# Altium PCB BrushlessDriver.PcbDoc (part 2 of 2)
Units mm, origin at the board's own origin, x right, y up, seen from the top; angles counter-clockwise.
Board outline 27.94 x 39.37 mm, 4 copper layers (Component Side, Ground Plane, Power Plane, Solder Side), stack 0.844 mm thick; 77 components, 59 nets, 274 pads, 183 vias.
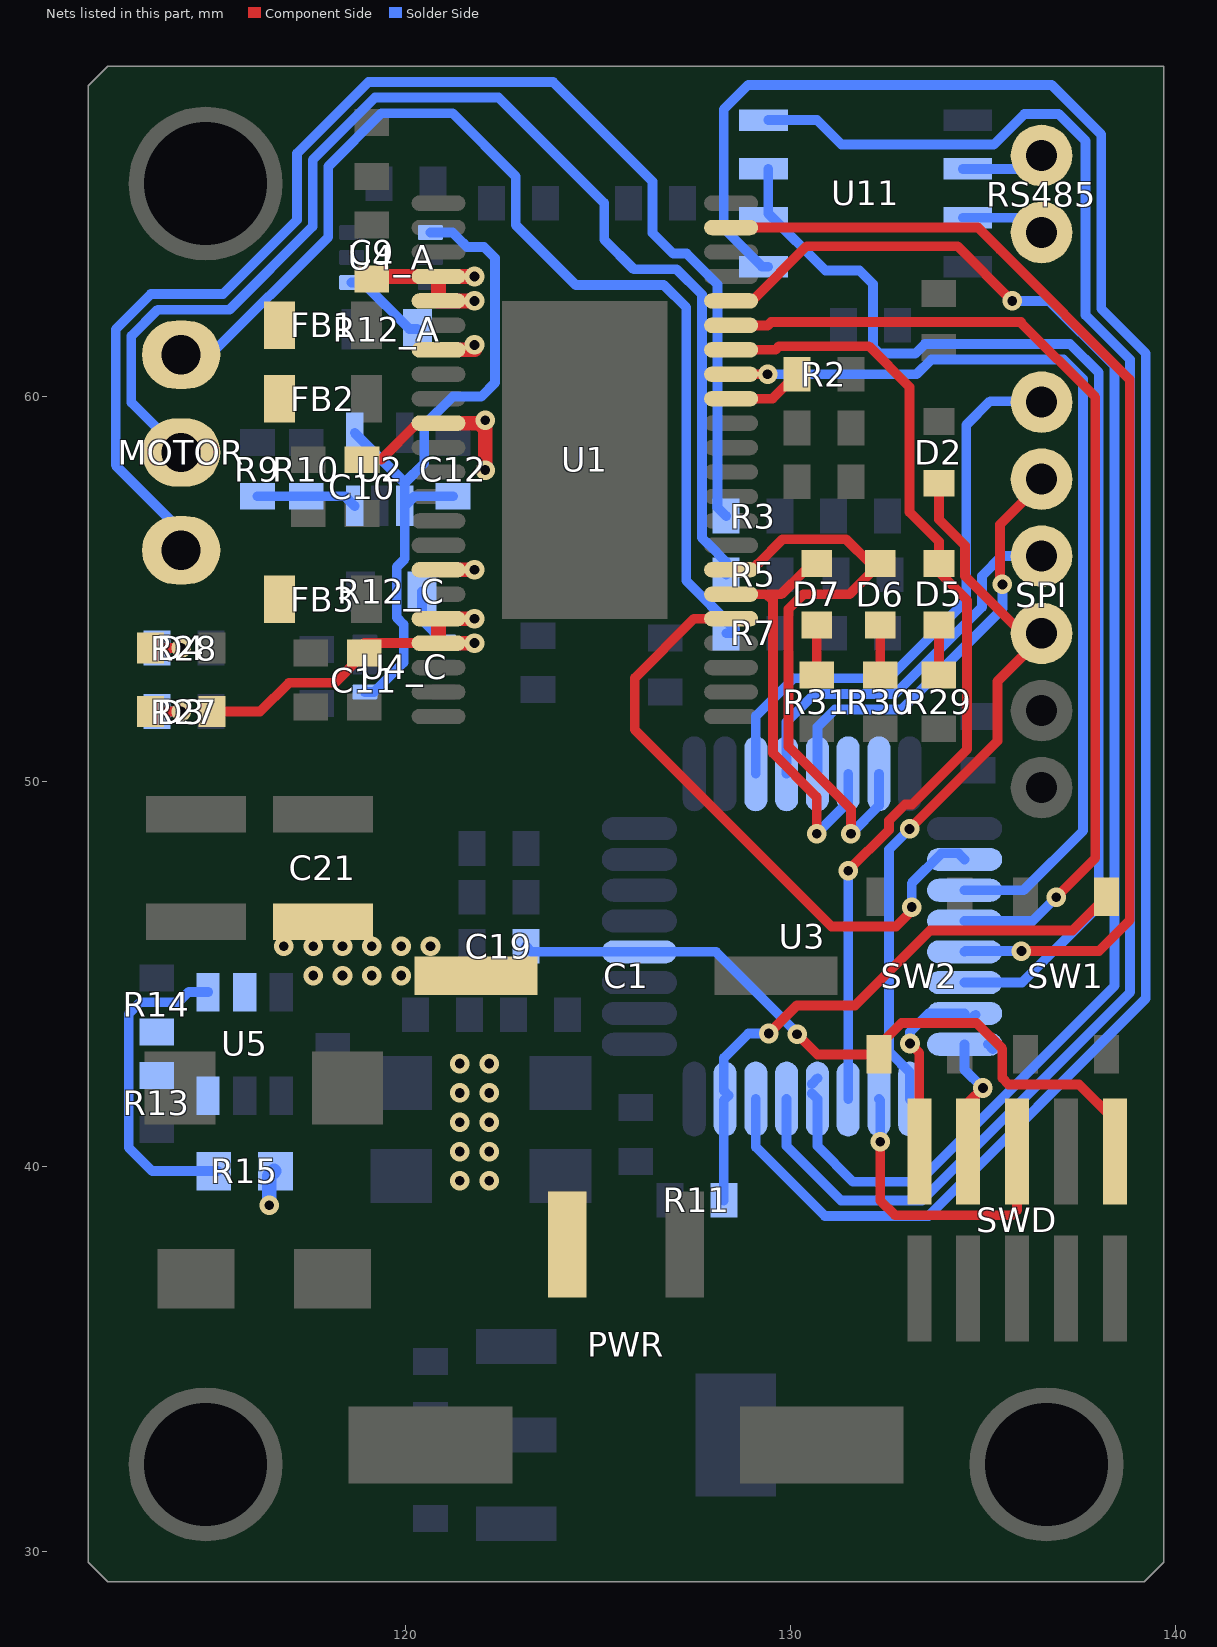
[diagram p4: the nets of this part, all layers, seen from the top]

## Via types
v1: diameter 0.508, hole 0.254, Component Side to Solder Side, 155 vias
v2: diameter 0.5, hole 0.2, Component Side to Solder Side, 28 vias

## Nets (pads, with @x,y where several pads share a name; then routed paths per layer and width w, separated by ;. In a path a pad name is that pad's centre, name@x,y a point inside that pad or via, vN(x,y) a via of type N, cw(c..) or ccw(c..) an arc to the next point about the centre after c; other vN are vias at no path point) (continued)
NetD3_C: D3.C R27.1 | length 1.4
  Component Side w0.254: D3.C@113.373,51.816 v1(114.173,51.816)
  Solder Side w0.254: R27.1@113.549,51.816 v1(114.173,51.816)
NetD4_C: D4.C R28.2 | length 1.4
  Component Side w0.254: D4.C@113.373,53.467 v1(114.173,53.467)
  Solder Side w0.254: R28.2@113.538,53.467 v1(114.173,53.467)
NetD5_C: D5.C R29.2 | length 1.3
  Component Side w0.254: R29.2@133.858,52.77 D5.C@133.858,54.064
NetD6_C: D6.C R30.2 | length 1.5
  Component Side w0.254: R30.2@132.08,52.77 R30.2@132.207,52.897 ; R30.2@132.334,52.77 D6.C@132.334,54.064
NetD7_C: D7.C R31.2 | length 1.3
  Component Side w0.254: R31.2@130.683,52.77 D7.C@130.683,54.064
NetR2_1: R2.1 U1.14 | length 2
  Component Side w0.254: U1.14@128.459,59.944 129.537,59.944 R2.1@130.172,60.579
NetR9_1: R9.1 R10.2 U2.3 | length 2.6
  Solder Side w0.254: R9.1@116.156,57.41 R10.2@117.426,57.41 118.431,57.41 U2.3@118.681,57.16
NetR11_2: R11.2 SW1.1 U3.31 | length 15.5
  Component Side w0.254: v1(129.438,43.452) 130.165,44.179 131.682,44.179 133.629,46.126 137.328,46.126 SW1.1@138.21,47.008
  Solder Side w0.254: R11.2@128.27,39.116 128.27,41.717 U3.31@128.302,41.749 128.397,41.844 128.27,41.971 128.27,42.814 128.907,43.452 v1(129.438,43.452)
NetR12_A_2: R12_A.2 U1.29 U4_A.4 | length 3.3
  Component Side w0.381: U1.29@120.859,61.214 121.793,61.214 v1(121.793,61.341)
  Solder Side w0.254: U4_A.4@118.6,62.962 118.89,62.962 120.1,61.752 R12_A.2@120.309,61.752
NetR12_C_2: R12_C.2 U1.38 U4_C.4 | length 2.5
  Component Side w0.381: U1.38@120.859,55.499 v1(121.793,55.499)
  Solder Side w0.254: R12_C.2@120.428,54.935 120.428,54.19 U4_C.4@120.994,53.624
NetR13_2: R13.2 R14.1 U5.3
NetR15_1: R15.1 U5.4 | length 8.3
  Solder Side w0.254: U5.4@114.874,44.53 114.367,44.53 114.104,44.267 113.113,44.267 112.809,43.962 112.809,40.49 113.421,39.878 R15.1@115.124,39.878
NRST: C19.2 SW2.1 SWD.10 U3.4 | length 19.3
  Component Side w0.254: v1(130.175,43.434) 130.701,42.908 SW2.1@132.3,42.908 132.448,43.056 132.448,43.287 132.887,43.725 134.837,43.725 135.506,43.056 135.506,42.292 135.669,42.129 137.5,42.129 138.43,41.199 SWD.10@138.43,40.386
  Solder Side w0.254: C19.2@123.128,45.72 123.274,45.574 U3.4@126.077,45.574 128.07,45.574 130.175,43.469 v1(130.175,43.434)
OUT_A: FB1.2 MOTOR.1 R7.2 | length 28.8
  Solder Side w0.254: MOTOR.1@114.173,61.087 114.935,61.087 117.996,64.148 117.996,65.982 119.374,67.361 121.227,67.361 122.865,65.722 122.865,64.46 124.424,62.901 126.71,62.901 127.296,62.315 127.296,55.213 128.555,53.954 128.555,53.848 R7.2@128.332,53.848
OUT_B: FB2.2 MOTOR.2 R5.2 | length 32.2
  Solder Side w0.254: MOTOR.2@114.173,58.547 112.878,59.842 112.878,61.571 113.562,62.255 115.427,62.255 117.589,64.418 117.589,66.151 119.206,67.767 122.42,67.767 125.163,65.025 125.163,64.075 125.93,63.307 127.044,63.307 127.703,62.648 127.703,56.33 127.866,56.167 127.871,56.167 128.332,55.706 R5.2@128.332,55.372
OUT_C: FB3.2 MOTOR.3 R3.2 | length 34.8
  Solder Side w0.254: MOTOR.3@114.173,56.007 114.173,56.514 112.471,58.215 112.471,61.747 113.386,62.662 115.259,62.662 117.183,64.586 117.183,66.319 119.037,68.174 123.838,68.174 126.421,65.59 126.421,64.248 126.956,63.714 127.307,63.714 128.109,62.912 128.109,57.119 R3.2@128.332,56.896
PA11: U1.21 U3.21 | length 30.7
  Component Side w0.254: U1.21@128.459,64.389 134.874,64.389 135.445,63.817 135.445,63.815 138.814,60.446 138.814,46.392 138.015,45.593 v1(136.002,45.593)
  Solder Side w0.254: U3.21@134.527,45.574 134.546,45.593 v1(136.002,45.593)
PB0: D7.A U1.6 U3.14 | length 11
  Component Side w0.254: U1.6@128.459,54.864 129.382,54.864 ; D7.A@130.492,55.474 130.511,55.454 130.354,55.454 129.763,54.864 129.382,54.864 ; v1(130.683,48.641) 130.683,49.6 129.547,50.736 129.547,54.699 129.382,54.864
  Solder Side w0.254: v1(130.683,48.641) 131.502,49.46 U3.14@131.502,50.199
PB1: D6.A U1.7 U3.15 | length 15.5
  Component Side w0.254: U1.7@128.459,55.499 128.992,55.499 129.147,55.655 129.158,55.655 129.796,56.293 131.451,56.293 D6.A@132.08,55.664 ; v1(131.572,48.641) 131.572,49.286 129.954,50.904 129.954,54.48 130.338,54.864 131.534,54.864 D6.A@132.334,55.664
  Solder Side w0.254: v1(131.572,48.641) 132.302,49.371 U3.15@132.302,50.199
PB4: D5.A U1.16 U3.27 | length 25.6
  Component Side w0.254: U1.16@128.459,61.214 129.612,61.214 129.706,61.308 132.038,61.308 133.096,60.25 133.096,56.996 133.858,56.234 D5.A@133.858,55.664 133.858,55.44 134.587,54.711 134.587,50.834 133.156,49.403 132.977,49.403 132.563,48.989 132.563,48.743 v1(131.502,47.682)
  Solder Side w0.254: U3.27@131.502,41.749 v1(131.502,47.682)
PB5: U1.18 U3.28 | length 39.8
  Component Side w0.254: U1.18@128.459,62.484 128.502,62.527 128.959,62.527 129.002,62.484 130.424,63.906 134.341,63.906 v1(135.763,62.484)
  Solder Side w0.254: U3.28@130.556,41.895 U3.28@130.702,41.749 130.702,40.526 131.63,39.599 133.325,39.599 138.417,44.691 138.417,60.791 136.724,62.484 v1(135.763,62.484) ; U3.28@130.556,42.139 U3.28@130.708,42.291
RS485_A: RS485.1 U11.6 | length 2.3
  Solder Side w0.254: U11.6@134.48,65.913 U11.6@134.607,65.913 136.287,65.913 RS485.1@136.652,66.278
RS485_B: RS485.2 U11.7 | length 2.3
  Solder Side w0.254: U11.7@134.48,64.643 U11.7@134.607,64.643 136.287,64.643 RS485.2@136.652,64.278
SPI1_MISO: SPI.3 U3.12 | length 10.2
  Solder Side w0.254: U3.12@129.902,50.199 129.902,51.543 130.632,52.273 132.721,52.273 134.976,54.528 134.976,55.339 135.491,55.855 SPI.3@136.525,55.855
SPI1_MOSI: SPI.2 U3.13 | length 11.2
  Component Side w0.254: v1(135.509,55.118) 135.445,55.181 135.445,56.674 SPI.2@136.652,57.88
  Solder Side w0.254: U3.13@130.702,50.199 130.702,51.412 131.157,51.867 132.889,51.867 135.509,54.486 v1(135.509,55.118)
SPI1_NSS/PA15: D2.A SPI.4 U3.25 | length 19.5
  Component Side w0.254: v1(133.096,48.768) 135.382,51.054 135.382,52.603 136.652,53.873 135.999,53.873 134.537,55.335 134.537,56.13 133.858,56.809 D2.A@133.858,57.747
  Solder Side w0.254: v1(133.096,48.768) 132.563,48.235 132.563,42.983 132.881,42.664 132.881,42.647 132.899,42.647 133.102,42.443 U3.25@133.102,41.749
SPI1_SCK: SPI.1 U3.11 | length 15.1
  Solder Side w0.254: U3.11@129.102,50.199 129.102,51.699 130.083,52.68 132.553,52.68 134.569,54.696 134.569,59.258 135.191,59.88 SPI.1@136.652,59.88
SWCLK: SWD.4 U3.24 | length 3.3
  Component Side w0.254: SWD.4@134.62,40.386 134.62,41.656 v1(135.001,42.037)
  Solder Side w0.254: U3.24@134.527,43.174 134.527,42.511 v1(135.001,42.037) ; U3.24@135.134,43.174 U3.24@135.255,43.053
SWDIO: SWD.2 U3.23 | length 5
  Component Side w0.254: v1(133.108,43.192) 133.35,42.95 SWD.2@133.35,40.386
  Solder Side w0.254: v1(133.108,43.192) 133.108,43.493 133.589,43.974 U3.23@134.527,43.974 ; U3.23@134.686,43.815 U3.23@134.813,43.942
SWO: SWD.6 U3.26 | length 7.9
  Component Side w0.254: v1(132.334,40.64) 132.334,39.116 132.718,38.732 135.76,38.732 135.89,38.862 SWD.6@135.89,40.386
  Solder Side w0.254: U3.26@132.302,41.749 132.334,41.717 v1(132.334,40.64)
TIM1_CH1: U1.5 U3.18 | length 16.4
  Component Side w0.254: U1.5@128.459,54.229 127.497,54.229 125.959,52.691 125.959,51.341 131.071,46.229 132.741,46.229 133.152,46.64 v1(133.152,46.736)
  Solder Side w0.254: v1(133.152,46.736) 133.152,47.356 133.929,48.133 134.368,48.133 U3.18@134.527,47.974
TIM1_CH2: U1.15 U3.19 | length 25
  Component Side w0.254: U1.15@128.459,60.579 v1(129.409,60.579)
  Solder Side w0.254: v1(129.409,60.579) 133.28,60.579 133.661,60.96 137.099,60.96 137.605,60.454 137.605,48.718 136.061,47.174 U3.19@134.527,47.174
TIM1_CH3: U1.17 U3.20 | length 26.4
  Component Side w0.254: U1.17@128.459,61.849 129.413,61.849 129.5,61.936 135.992,61.936 135.981,61.925 137.922,59.984 137.922,48.006 v1(136.906,46.99)
  Solder Side w0.254: U3.20@134.527,46.374 136.29,46.374 v1(136.906,46.99)
USART1_RTS_DE: U3.22 U11.2 U11.3 | length 30.8
  Solder Side w0.254: U11.3@129.425,65.913 129.425,64.758 130.912,63.271 131.793,63.271 132.143,62.921 132.143,61.366 132.151,61.366 132.151,61.283 132.314,61.12 133.246,61.12 133.493,61.366 137.267,61.366 138.011,60.622 138.011,46.766 136.019,44.774 U3.22@134.527,44.774
USART1_RX: U3.30 U11.1 | length 52.7
  Solder Side w0.254: U3.30@129.102,41.749 129.102,40.503 130.896,38.71 133.585,38.71 139.23,44.355 139.23,61.127 138.074,62.283 138.074,66.814 136.791,68.097 128.903,68.097 128.27,67.465 128.27,64.361 129.258,63.373 U11.1@129.298,63.373 U11.1@129.425,63.373
USART1_TX: U3.29 U11.4 | length 44.7
  Solder Side w0.254: U11.4@129.425,67.183 130.691,67.183 131.326,66.548 135.284,66.548 136.078,67.341 136.972,67.341 137.668,66.646 137.668,62.115 138.824,60.959 138.824,44.523 133.417,39.116 131.318,39.116 129.902,40.532 U3.29@129.902,41.749
VBAT: C1.1 C9.1 C10.1 C11.1 C21.2 D3.A PWR.2 R15.2 U1.26 U1.27 U1.32 U1.40 U1.41 U5.5 | length 19.2
  Component Side w0.254: D3.A@114.973,51.816 116.224,51.816 116.971,52.563 118.163,52.563 C11.1@118.934,53.334 118.934,53.594 U1.41@120.859,53.594 ; C10.1@118.872,58.358 119.365,58.358 120.316,59.309 U1.32@120.859,59.309
  Component Side w0.381: C9.1@119.126,63.116 119.129,63.119 U1.26@120.859,63.119 ; U1.32@120.859,59.309 121.92,59.309 122.072,59.157 v1(122.072,58.09) ; v1(121.793,53.594) U1.41@120.859,53.594 U1.40@120.859,54.229 v1(121.793,54.229) ; v1(121.793,62.484) U1.27@120.859,62.484 U1.26@120.859,63.119 ; v1(121.793,63.119) U1.26@120.859,63.119
  Solder Side w0.381: v1(116.459,38.989) 116.459,39.751 R15.2@116.586,39.878
  other v1: 121.412,39.624 122.174,39.624 121.412,40.386 122.174,40.386 121.412,41.148 122.174,41.148 121.412,41.91 122.174,41.91 121.412,42.672 122.174,42.672 117.602,44.958 118.364,44.958 119.126,44.958 119.888,44.958 116.84,45.72 117.602,45.72 118.364,45.72 119.126,45.72 119.888,45.72 120.65,45.72 122.072,59.385
VBIAS: C12.2 U2.1 U2.4 U4_A.1 U4_C.1 | length 18.5
  Solder Side w0.254: U2.4@118.681,59.06 119.981,57.76 ; U4_C.1@118.944,52.324 119.185,52.324 119.955,53.094 119.955,54.079 119.774,54.26 119.774,55.576 119.981,55.783 U2.1@119.981,57.16 ; U4_A.1@120.65,64.262 121.219,64.262 121.492,63.989 121.501,63.989 121.602,63.888 122.04,63.888 122.326,63.602 122.326,60.358 121.97,60.002 121.233,60.002 120.485,59.254 120.485,58.264 119.981,57.76 ; C12.2@121.236,57.41 120.231,57.41 U2.1@119.981,57.16 ; U2.1@119.981,57.16 119.981,57.76
pads on no net: SW1.2 SW1.3 SW2.2 SW2.3 SWD.7 SWD.8 X1.2

## Polygon pours and split planes (outlines as drawn)
NetR12_C_2 on Solder Side "Power" (solid, pour order 50): 120.015,54.356 120.904,54.356 121.666,55.118 122.301,55.118 122.301,55.88 120.015,55.88
NetC22_2 on Solder Side "Power" (solid, pour order 40): 116.332,45.085 117.602,45.085 118.999,43.688 118.999,42.291 117.475,42.291 117.475,42.926 116.332,44.069
NetR12_A_2 on Solder Side "Power" (solid, pour order 48): 119.888,62.357 119.888,61.087 120.777,61.087 121.031,60.833 122.301,60.833 122.301,61.849 121.285,61.849 120.777,62.357
NetR13_2 on Solder Side "Power" (solid, pour order 36): 113.063,43.942 113.961,43.942 115.189,42.714 115.189,41.275 114.554,41.275 113.919,41.91 113.063,41.91
12V on Solder Side "Solder Side-No Net" (solid, pour order 38): 113.03,44.45 114.013,44.45 114.013,44.925 114.3,45.212 115.316,45.212 115.316,46.101 113.03,46.101
GND on Solder Side "Power" (solid, pour order 10): 119.355,55.88 117.34,55.88 117.34,54.385 119.355,54.385
GND on Solder Side "Power" (solid, pour order 8): 119.509,62.23 117.221,62.23 117.221,60.694 119.509,60.694
NetC22_1 on Solder Side "Power" (solid, pour order 46): 116.332,42.418 118.999,42.418 118.999,41.275 116.332,41.275
VBAT on Solder Side "Solder Side-No Net" (solid, pour order 42): 114.935,43.942 117.348,43.942 117.983,44.577 120.523,44.577 121.158,45.212 121.158,46.101 114.935,46.101
3V3 on Solder Side "Std" (solid, pour order 4): 117.602,39.758 117.602,29.21 139.192,29.21 139.7,29.718 139.7,44.323 135.135,39.758
12V on Solder Side "Power" (solid, pour order 24): 120.175,34.671 123.88,34.671 123.88,35.814 120.142,35.814
GND on Solder Side "Component Side-No Net1" (solid, pour order 64): 111.76,29.718 112.268,29.21 139.192,29.21 139.7,29.718 139.7,68.58 111.76,68.58
GND on Solder Side "Power" (solid, pour order 68): 121.285,62.23 128.016,62.23 128.016,54.483 121.285,54.483
3V3 on Solder Side "Power" (solid, pour order 76): 125.73,35.687 125.73,30.48 130.937,30.48 130.937,35.687
OUT_C on Component Side "Power" (solid, pour order 60): 117.221,55.406 117.221,53.987 113.653,53.987 112.776,54.864 112.776,57.277 115.626,57.277
OUT_A on Component Side "Power" (solid, pour order 55): 117.221,62.611 117.221,60.833 116.332,60.833 115.316,59.817 112.776,59.817 112.776,62.611
NetC6_2 on Component Side "Power" (solid, pour order 54): 118.618,59.309 120.904,59.309 120.904,60.579 118.618,60.579
12V on Component Side "Power" (solid, pour order 30): 113.204,46.99 113.204,41.16 113.284,41.08 115.443,41.08 115.443,43.434 116.205,44.196 116.205,46.99
NetC4_2 on Component Side "Power" (solid, pour order 16): 119.003,61.225 120.853,61.225 120.853,62.461 119.003,62.461
NetC8_2 on Component Side "Power" (solid, pour order 22): 118.9,54.094 120.859,54.094 120.859,55.33 118.9,55.33
VBAT on Component Side "Power" (solid, pour order 14): 116.332,46.99 122.282,46.99 125.73,43.542 125.73,36.195 120.142,36.195 120.142,42.708 118.146,44.704 116.332,44.704
NetC22_2 on Component Side "Power" (solid, pour order 34): 120.269,36.195 120.269,45.29 117.348,45.29 117.348,38.1 117.094,37.846 117.094,36.195
OUT_B on Component Side "Power" (solid, pour order 58): 117.221,60.833 117.221,58.674 115.824,57.277 112.776,57.277 112.776,59.817 115.316,59.817 116.332,60.833
GND on Component Side "Component Side-No Net" (solid, pour order 62): 111.76,29.718 112.268,29.21 139.192,29.21 139.7,29.718 139.7,68.58 111.76,68.58
GND on Component Side "Power" (solid, pour order 66): 120.859,65.024 120.859,51.689 128.459,51.689 128.459,65.024
GND on Component Side "Power" (solid, pour order 70): 127.577,45.965 127.577,44.011 127.508,43.942 127.635,43.815 132.334,43.815 132.334,45.754 131.859,46.229
GND on Component Side "Power" (solid, pour order 72): 126.365,39.758 126.365,36.068 128.524,36.068 128.778,36.322 128.524,36.576 128.524,39.666
GND on Component Side "Power" (solid, pour order 74): 112.497,50.368 112.522,50.343 112.522,47.701 119.786,47.701 120.447,48.362 119.71,49.098 119.71,50.597
GND on Component Side "Power" (solid, pour order 78): 112.776,38.608 116.248,38.608 116.332,38.524 116.332,35.56 112.776,35.56
GND on Ground Plane (split plane): 139.19,29.929 138.981,29.72 112.479,29.72 112.27,29.929 112.27,67.861 112.479,68.07 139.19,68.07
VBAT on Power Plane (split plane): 122.807,62.862 122.807,42.242 122.807,39.678 121.866,38.737 116.208,38.737 115.572,39.373 115.572,50.365 118.837,53.629 118.865,53.671 118.874,53.721 118.874,62.266 120.36,63.752 121.917,63.752
12V on Power Plane (split plane): 127.76,66.113 127.76,49.33 125.638,47.209 125.61,47.167 125.601,47.117 125.601,29.72 112.479,29.72 112.27,29.929 112.27,47.063 115.314,50.106 115.314,39.319 115.323,39.27 115.351,39.228 116.063,38.516 116.105,38.488 116.154,38.479 121.92,38.479 121.97,38.488 122.012,38.516 123.028,39.532 123.056,39.574 123.065,39.624 123.065,42.242 123.065,62.916 123.056,62.965 123.028,63.007 122.062,63.973 122.02,64.001 121.971,64.01 120.435,64.01 120.435,65.388 121.466,66.419 127.454,66.419
3V3 on Power Plane (split plane): 139.19,29.929 138.981,29.72 125.859,29.72 125.859,47.063 127.981,49.184 128.009,49.226 128.018,49.276 128.018,66.167 128.009,66.217 127.981,66.259 127.6,66.64 127.558,66.668 127.508,66.677 121.412,66.677 121.362,66.668 121.32,66.64 120.214,65.534 120.186,65.492 120.177,65.442 120.177,63.935 118.653,62.412 118.625,62.37 118.616,62.32 118.616,53.775 112.27,47.43 112.27,67.861 112.479,68.07 139.19,68.07

## Keep-outs
Keep-Out Layer:
  the board outline again, w0.254

## Other copper
Solder Side:
  region: 116.884,36.721 116.858,36.721 116.858,36.694 116.831,36.694 116.831,36.668 116.805,36.668 116.805,36.641 116.805,36.615 116.805,36.589 116.805,36.562 116.805,36.536 116.805,36.509 116.831,36.509 116.831,36.483 116.858,36.483 116.858,36.457 116.963,36.457 116.963,36.483 116.99,36.483 116.99,36.509 117.016,36.509 117.016,36.536 117.042,36.536 117.042,36.562 117.042,36.589 117.042,36.615 117.042,36.641 117.042,36.668 117.042,36.694 117.016,36.694 117.016,36.721 116.99,36.721 116.99,36.747 116.884,36.747
  region: 121.901,37.513 121.875,37.513 121.875,37.486 121.848,37.486 121.848,37.46 121.769,37.46 121.769,37.434 121.716,37.434 121.716,37.407 121.69,37.407 121.69,37.381 121.663,37.381 121.663,37.354 121.663,37.328 121.637,37.328 121.637,37.302 121.637,37.275 121.637,37.249 121.637,37.222 121.637,37.196 121.637,37.17 121.637,37.143 121.637,37.117 121.663,37.117 121.663,37.09 121.663,37.064 121.663,37.037 121.69,37.037 121.69,37.011 121.716,37.011 121.716,36.985 121.743,36.985 121.743,36.958 122.112,36.958 122.112,36.985 122.139,36.985 122.139,37.011 122.165,37.011 122.165,37.037 122.165,37.064 122.165,37.09 122.165,37.117 122.165,37.143 122.165,37.17 122.165,37.196 122.165,37.222 122.165,37.249 122.165,37.275 122.139,37.275 122.139,37.302 122.139,37.328 122.139,37.354 122.112,37.354 122.112,37.381 122.112,37.407 122.086,37.407 122.086,37.434 122.086,37.46 122.059,37.46 122.059,37.486 122.033,37.486 122.033,37.513 122.007,37.513 122.007,37.539 121.901,37.539 hole: 121.848,37.275 121.954,37.275 121.954,37.249 121.954,37.222 121.98,37.222 121.98,37.196 121.98,37.17 121.98,37.143 121.848,37.143 121.848,37.17 121.822,37.17 121.822,37.196 121.822,37.222 121.822,37.249 121.848,37.249
  region: 116.726,38.226 116.699,38.226 116.699,38.199 116.673,38.199 116.673,38.173 116.673,38.146 116.673,38.12 116.673,38.094 116.673,38.067 116.673,38.041 116.673,38.014 116.673,37.988 116.673,37.962 116.673,37.935 116.673,37.909 116.673,37.882 116.673,37.856 116.673,37.83 116.673,37.803 116.673,37.777 116.673,37.75 116.673,37.724 116.673,37.698 116.673,37.671 116.673,37.645 116.673,37.618 116.673,37.592 116.699,37.592 116.699,37.566 116.699,37.539 116.699,37.513 116.699,37.486 116.699,37.46 116.699,37.434 116.699,37.407 116.699,37.381 116.699,37.354 116.699,37.328 116.699,37.302 116.699,37.275 116.699,37.249 116.699,37.222 116.726,37.222 116.726,37.196 116.726,37.17 116.752,37.17 116.752,37.143 116.752,37.117 116.752,37.09 116.752,37.064 116.752,37.037 116.752,37.011 116.752,36.985 116.752,36.958 116.752,36.932 116.778,36.932 116.778,36.905 116.805,36.905 116.805,36.879 116.884,36.879 116.884,36.905 116.91,36.905 116.91,36.932 116.937,36.932 116.937,36.958 116.937,36.985 116.937,37.011 116.937,37.037 116.937,37.064 116.937,37.09 116.937,37.117 116.937,37.143 116.937,37.17 116.937,37.196 116.937,37.222 116.937,37.249 116.91,37.249 116.91,37.275 116.884,37.275 116.884,37.302 116.884,37.328 116.884,37.354 116.884,37.381 116.884,37.407 116.884,37.434 116.884,37.46 116.884,37.486 116.884,37.513 116.884,37.539 116.884,37.566 116.884,37.592 116.884,37.618 116.858,37.618 116.858,37.645 116.858,37.671 116.858,37.698 116.858,37.724 116.858,37.75 116.858,37.777 116.858,37.803 116.858,37.83 116.858,37.856 116.858,37.882 116.858,37.909 116.858,37.935 116.858,37.962 116.858,37.988 116.858,38.014 116.858,38.041 116.858,38.067 116.858,38.094 116.858,38.12 116.858,38.146 116.858,38.173 116.858,38.199 116.831,38.199 116.831,38.226 116.805,38.226 116.805,38.252 116.726,38.252
  region: 118.046,37.645 118.019,37.645 118.019,37.618 117.993,37.618 117.993,37.592 117.993,37.566 117.993,37.539 117.993,37.513 118.019,37.513 118.019,37.486 118.046,37.486 118.046,37.46 118.099,37.46 118.099,37.434 118.125,37.434 118.125,37.407 118.125,37.381 118.151,37.381 118.151,37.354 118.151,37.328 118.178,37.328 118.178,37.302 118.204,37.302 118.204,37.275 118.257,37.275 118.257,37.249 118.257,37.222 118.283,37.222 118.283,37.196 118.283,37.17 118.283,37.143 118.31,37.143 118.31,37.117 118.31,37.09 118.336,37.09 118.336,37.064 118.336,37.037 118.336,37.011 118.336,36.985 118.336,36.958 118.336,36.932 118.336,36.905 118.336,36.879 118.336,36.853 118.336,36.826 118.336,36.8 118.336,36.773 118.363,36.773 118.363,36.747 118.389,36.747 118.389,36.721 118.468,36.721 118.468,36.747 118.495,36.747 118.495,36.773 118.521,36.773 118.521,36.8 118.521,36.826 118.521,36.853 118.521,36.879 118.521,36.905 118.521,36.932 118.548,36.932 118.548,36.958 118.548,36.985 118.548,37.011 118.548,37.037 118.548,37.064 118.548,37.09 118.548,37.117 118.548,37.143 118.548,37.17 118.548,37.196 118.548,37.222 118.548,37.249 118.548,37.275 118.548,37.302 118.548,37.328 118.548,37.354 118.548,37.381 118.548,37.407 118.548,37.434 118.548,37.46 118.548,37.486 118.548,37.513 118.548,37.539 118.548,37.566 118.548,37.592 118.521,37.592 118.521,37.618 118.495,37.618 118.495,37.645 118.416,37.645 118.416,37.618 118.389,37.618 118.389,37.592 118.363,37.592 118.363,37.566 118.363,37.539 118.363,37.513 118.363,37.486 118.363,37.46 118.363,37.434 118.31,37.434 118.31,37.46 118.31,37.486 118.31,37.513 118.283,37.513 118.283,37.539 118.257,37.539 118.257,37.566 118.231,37.566 118.231,37.592 118.204,37.592 118.204,37.618 118.178,37.618 118.178,37.645 118.125,37.645 118.125,37.671 118.046,37.671
  region: 119.709,37.909 119.683,37.909 119.683,37.882 119.657,37.882 119.657,37.856 119.63,37.856 119.63,37.83 119.63,37.803 119.604,37.803 119.604,37.777 119.577,37.777 119.577,37.75 119.577,37.724 119.577,37.698 119.577,37.671 119.577,37.645 119.577,37.618 119.577,37.592 119.577,37.566 119.604,37.566 119.604,37.539 119.604,37.513 119.63,37.513 119.63,37.486 119.657,37.486 119.657,37.46 119.683,37.46 119.683,37.434 119.709,37.434 119.709,37.407 119.789,37.407 119.789,37.381 119.815,37.381 119.815,37.354 119.921,37.354 119.921,37.328 119.921,37.302 119.921,37.275 119.894,37.275 119.894,37.249 119.789,37.249 119.789,37.222 119.709,37.222 119.709,37.196 119.683,37.196 119.683,37.17 119.657,37.17 119.657,37.143 119.657,37.117 119.657,37.09 119.683,37.09 119.683,37.064 119.709,37.064 119.709,37.037 119.868,37.037 119.868,37.064 120,37.064 120,37.09 120.026,37.09 120.026,37.117 120.053,37.117 120.053,37.143 120.053,37.17 120.053,37.196 120.079,37.196 120.079,37.222 120.105,37.222 120.105,37.249 120.105,37.275 120.132,37.275 120.132,37.302 120.132,37.328 120.132,37.354 120.132,37.381 120.132,37.407 120.132,37.434 120.132,37.46 120.132,37.486 120.132,37.513 120.132,37.539 120.132,37.566 120.132,37.592 120.132,37.618 120.105,37.618 120.105,37.645 120.105,37.671 120.105,37.698 120.105,37.724 120.105,37.75 120.105,37.777 120.079,37.777 120.079,37.803 120.079,37.83 120.053,37.83 120.053,37.856 120.026,37.856 120.026,37.882 119.973,37.882 119.973,37.909 119.947,37.909 119.947,37.935 119.709,37.935 hole: 119.789,37.75 119.868,37.75 119.868,37.724 119.894,37.724 119.894,37.698 119.921,37.698 119.921,37.671 119.921,37.645 119.921,37.618 119.921,37.592 119.921,37.566 119.868,37.566 119.868,37.592 119.789,37.592 119.789,37.618 119.762,37.618 119.762,37.645 119.762,37.671 119.762,37.698 119.762,37.724 119.789,37.724
  region: 163 vertices and 0 holes, not listed, extent 117.148,36.826 117.914,37.909
  region: 119.023,37.909 118.97,37.909 118.97,37.882 118.944,37.882 118.944,37.856 118.917,37.856 118.917,37.83 118.891,37.83 118.891,37.803 118.864,37.803 118.864,37.777 118.838,37.777 118.838,37.75 118.812,37.75 118.812,37.724 118.785,37.724 118.785,37.698 118.785,37.671 118.785,37.645 118.785,37.618 118.785,37.592 118.785,37.566 118.785,37.539 118.785,37.513 118.785,37.486 118.785,37.46 118.785,37.434 118.785,37.407 118.785,37.381 118.785,37.354 118.785,37.328 118.785,37.302 118.785,37.275 118.759,37.275 118.759,37.249 118.732,37.249 118.732,37.222 118.732,37.196 118.732,37.17 118.732,37.143 118.759,37.143 118.759,37.117 118.785,37.117 118.785,37.09 118.864,37.09 118.864,37.117 118.891,37.117 118.891,37.143 118.917,37.143 118.917,37.17 118.944,37.17 118.944,37.196 118.97,37.196 118.97,37.222 118.97,37.249 118.97,37.275 118.996,37.275 118.996,37.249 119.023,37.249 119.023,37.222 119.049,37.222 119.049,37.196 119.102,37.196 119.102,37.17 119.313,37.17 119.313,37.196 119.34,37.196 119.34,37.222 119.366,37.222 119.366,37.249 119.366,37.275 119.392,37.275 119.392,37.302 119.419,37.302 119.419,37.328 119.445,37.328 119.445,37.354 119.445,37.381 119.445,37.407 119.445,37.434 119.445,37.46 119.445,37.486 119.445,37.513 119.445,37.539 119.445,37.566 119.445,37.592 119.419,37.592 119.419,37.618 119.392,37.618 119.392,37.645 119.366,37.645 119.366,37.671 119.366,37.698 119.366,37.724 119.366,37.75 119.34,37.75 119.34,37.777 119.34,37.803 119.34,37.83 119.34,37.856 119.34,37.882 119.313,37.882 119.313,37.909 119.287,37.909 119.287,37.935 119.023,37.935 hole: 119.102,37.75 119.155,37.75 119.155,37.724 119.155,37.698 119.181,37.698 119.181,37.671 119.181,37.645 119.181,37.618 119.181,37.592 119.208,37.592 119.208,37.566 119.208,37.539 119.234,37.539 119.234,37.513 119.26,37.513 119.26,37.486 119.26,37.46 119.26,37.434 119.26,37.407 119.234,37.407 119.234,37.381 119.234,37.354 119.155,37.354 119.155,37.381 119.128,37.381 119.128,37.407 119.102,37.407 119.102,37.434 119.102,37.46 119.076,37.46 119.076,37.486 119.076,37.513 119.049,37.513 119.049,37.539 119.049,37.566 119.049,37.592 119.049,37.618 119.049,37.645 119.049,37.671 119.049,37.698 119.049,37.724 119.102,37.724
  region: 174 vertices and 1 holes, not listed, extent 120.211,36.457 120.845,38.358
  region: 234 vertices and 1 holes, not listed, extent 122.35,36.14 123.063,38.041
Power Plane (plane layer: these items are gaps in the copper):
  lines w0.254: 111.76,35.56 111.76,43.815 ; 111.76,50.292 111.76,46.736 118.745,53.721 118.745,62.32 120.306,63.881 ; 115.443,50.419 115.443,39.319 116.154,38.608 116.967,38.608 121.92,38.608 122.936,39.624 122.936,42.242 122.936,62.916 121.971,63.881 120.306,63.881 ; 125.73,29.21 125.73,47.117 127.889,49.276 127.889,66.167 127.508,66.548 121.412,66.548 120.306,65.442 120.306,63.881 ; 128.27,68.58 128.524,68.326

## Silkscreen, mask and mechanical layers (free items; w line width, h text height)
Top Overlay:
  text "BrushlessDriver" at 120.904,66.675 h2.54
  text "brent yi" at 132.842,62.23 h1.27 r90
  text "may '17" at 131.637,62.103 h1.27 r90
  text "revision a" at 130.302,61.468 h1.27 r90
  text "+" at 120.396,29.845 h1.52
  text "-" at 132.207,29.718 h1.52
Bottom Overlay:
  drawing of 30 lines, arcs and shapes, not listed
  text "485A" at 139.319,67.564 h0.51 r45
  text "485B" at 139.319,65.786 h0.51 r45
  text "SCK" at 138.887,61.087 h0.51 r45
  text "MOSI" at 139.268,59.182 h0.51 r45
  text "MISO" at 139.268,57.15 h0.51 r45
  text "SS" at 138.646,54.737 h0.51 r45
  text "3V3" at 138.887,53.074 h0.51 r45
  text "GND" at 138.887,51.074 h0.51 r45
  text "13~48V in / 3.5A / 6.5A out" at 138.811,47.498 h1.27 r90
  text "brushless driver" at 132.207,40.259 h1.91 r90
  text "brentyi@berkeley.edu" at 133.985,40.259 h1.27 r90